# Altium PCB PowerScr.PcbDoc
Units mil, origin at the board's own origin, x right, y up, seen from the top; angles counter-clockwise.
Board outline 1889.76 x 2125 mil, 2 copper layers (Top Layer, Bottom Layer); 21 components, 12 nets, 65 pads, 14 vias.
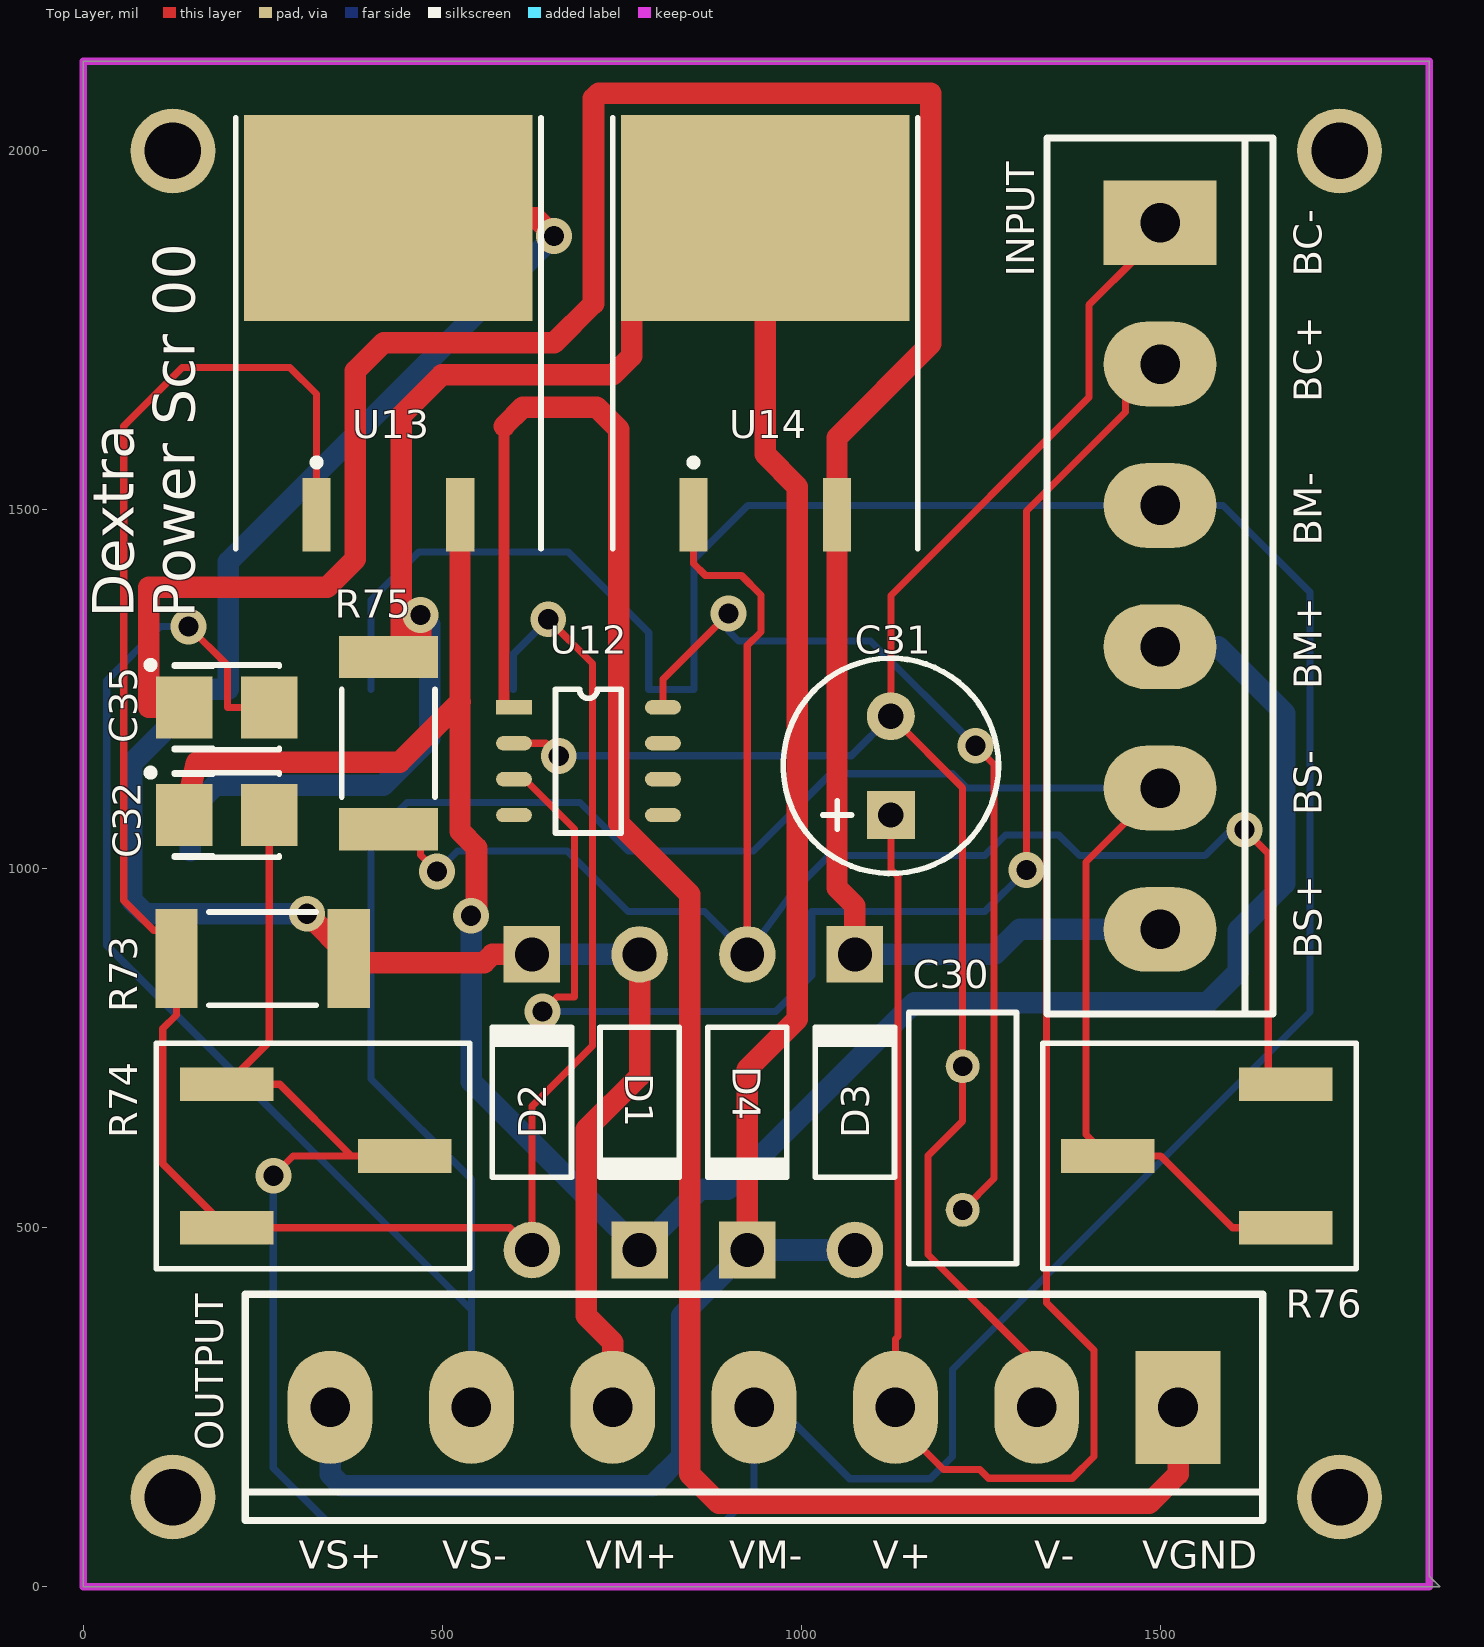
[diagram p0: Top Layer view]
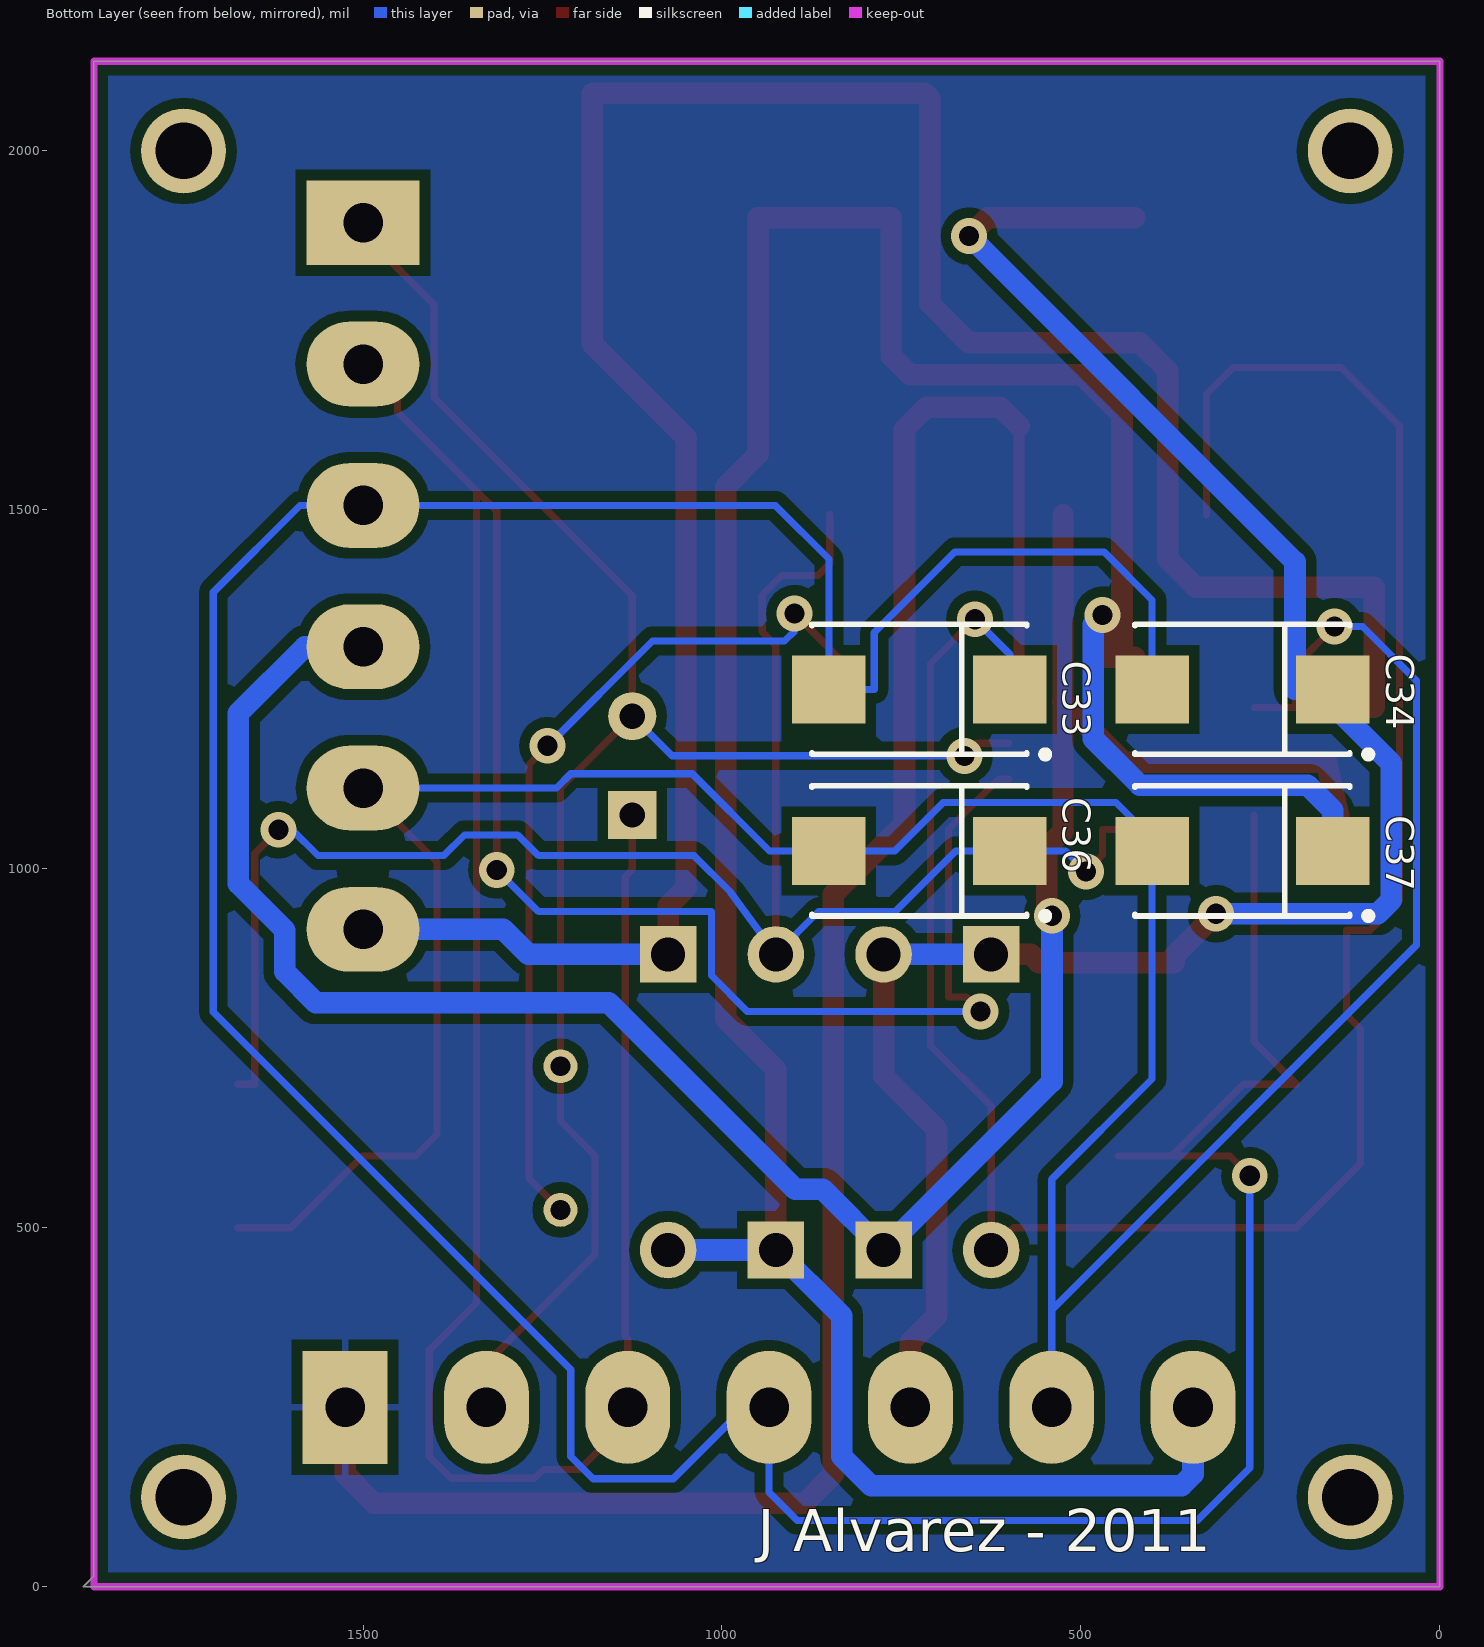
[diagram p1: Bottom Layer view, seen from below]

## Layer stack, top to bottom
Top Layer: signal copper 1.4
Dielectric: core 12.6, FR-4, Dk 4.8
Bottom Layer: signal copper 1.4

## Board outline
0,2125 1875,2125 1875,14.76 1889.76,0 0,0 0,2100 0,2125

## Design rules (kind name [scope] priority, off if disabled: settings)
Clearance [All] p1: gap=15
HoleToHoleClearance [All] p1: gap=15 allowstackedmicrovias=TRUE
MinimumSolderMaskSliver [All] p1: minsoldermaskwidth=8
PolygonConnect [All] p1: connectstyle=Relief reliefconductorwidth=10 reliefentries=4 polygonreliefangle="90 Angle"
RoomDefinition PowerScr [InComponentClass('PowerScr')] p1: confinementstyle=ConfineIn formatcopy=TRUE lockcomponents=FALSE outline 0,0 1875,0 1875,2125 0,2125
RoutingPriority [InNet('VGND')] p1: routingpriority=1
RoutingVias [All] p1: holewidth=28 width=50 viastyle="Through Hole" minholewidth=28 minwidth=50 maxholewidth=28 maxwidth=50
SMDNeckDown [All] p1: percent=75.000
SMDToCorner [All] p1 off: distance=0
SilkToSilkClearance [All] p1: silktosilkclearance=0
SilkscreenOverComponentPads [All] p1: minsilkscreentomaskgap=5
SolderMaskExpansion [All] p1: expansion=4
ViasUnderSMD [All] p1: allowed=FALSE
Width "Width GND" [InNet('VGND')] p1: maxlimit=40 minlimit=8 preferedwidth=30
Width "Width BATM" [InNet('BATMOT+')] p2: maxlimit=30 minlimit=8 preferedwidth=30
Width "Width BATS" [InNet('BATSTP+')] p3: maxlimit=40 minlimit=8 preferedwidth=30
Width "Width STP+" [InNet('VSTP+')] p4: maxlimit=40 minlimit=8 preferedwidth=30
Width "Width VM+" [InNet('VM+')] p5: maxlimit=30 minlimit=8 preferedwidth=30
Width [All] p6: maxlimit=10 minlimit=10 preferedwidth=10
23 further rules are at their usual default settings.

## Components (designator, comment, footprint, x,y, rotation, side; value= is the part's Value field where it differs from the comment)
C30 "Cap" RAD-0.2 1225,625 r270 top
C31 "Cap Pol1" C100UFB 1125,1075 r90 top
C32 "593D105X0020B2" 3528 200,1075 r0 top
C33 "593D226X0020D2" 7343 725,1250 r0 bottom
C34 "593D226X0020D2" 7343 275,1250 r0 bottom
C35 "593D105X0020B2" 3528 200,1225 r0 top
C36 "593D226X0020D2" 7343 725,1025 r0 bottom
C37 "593D226X0020D2" 7343 275,1025 r0 bottom
D1 "1N4002" DO-41 775,675 r270 top
D2 "1N4002" DO-41 625,675 r90 top
D3 "1N4002" DO-41 1075,675 r90 top
D4 "1N4002" DO-41 925,675 r270 top
INPUT "INPUT" AZUL5-6 1500,1900 r270 top (schematic designator P5)
OUTPUT "OUTPUT" AZUL5-7 1525,250 r180 top (schematic designator P6)
R73 "Res3" RESC6332M 250,875 r0 top
R74 "POT3361" 3361P 200,600 r270 top
R75 "Res3" RESC6332M 425,1175 r90 top
R76 "POT3361" 3361P 1675,600 r90 top
U12 "TLE2426" "SOP8 - duplicate" 600,1225 r0 top
U13 "LM317BD2T" 936-03 425,1700 r0 top
U14 "LM317BD2T" 936-03 950,1700 r0 top

## Footprints (in the part's own frame and the unit in brackets; to place one, negate y for a bottom-side part, rotate by r counter-clockwise, add the part's x,y. Pads: shape width x height; smd on the part's side, far side on the other; paste and mask are expansions set on the pad)
936-03 [mm] "D2-PAK/TO-263-AB; 3 Leads (1 Cropped); Body 14.7 (inc. leads) x 10.2 mm (LxW max)"
  rect 1x2.6 smd: 1(-2.54,-5.25) 3(2.54,-5.25)
  rect 10.2x7.3 smd: 4(0,5.25)
  silkscreen extent -5.4,-6.45 5.4,8.8
3361P [mm]
  rect 1.19x3.3 smd: 1(-2.54,0) 2(0,6.3) 3(2.54,0)
  silkscreen extent -3.99,-2.5 3.99,8.6
3528 [mm] "Capacitor, SM Tantalum; Body 3.5 x 2.8 mm (LxW typ)"
  rect 2x2.2 smd: 1(-1.5,0) 2(1.5,0)
  silkscreen extent -2.82,-1.5 1.85,1.62
7343 [mm] "Capacitor, SM Tantalum; Body 7.3 x 4.3 mm (LxW typ)"
  rect 2.6x2.4 smd: 1(-3.2,0) 2(3.2,0)
  silkscreen extent -4.57,-2.3 3.8,2.42
AZUL5-6 [mm]
  rect 3x4 hole 1.4: 1(0,0)
  oval 3x4 hole 1.4: 2(5,0) 3(10,0) 4(15,0) 5(20,0) 6(25,0)
  silkscreen extent -3,-4 28,4
AZUL5-7 [mm]
  rect 3x4 hole 1.4: 1(0,0)
  oval 3x4 hole 1.4: 2(5,0) 3(10,0) 4(15,0) 5(20,0) 6(25,0) 7(30,0)
  silkscreen extent -3,-4 33,4
C100UFB [mm]
  rect 1.7x1.7 hole 0.9: 1(0,0)
  round 1.7 hole 0.9: 2(3.5,0)
  silkscreen extent -2.07,-3.81 5.55,3.81
DO-41 [mm] "Diode, Axial; Body 5.2 x 2.7 mm (LxDia. max), Lead Dia. 0.86 mm (max)"
  round 2 hole 1.2: 1(-5.23,0)
  rect 2x2 hole 1.2: 2(5.23,0)
  silkscreen extent -2.65,-1.4 2.75,1.4
RAD-0.2 [mm] "Radial Cap, Thru-Hole; 2 Leads; 0.2 in Pin Spacing"
  round 1.2 hole 0.7: 1(-2.54,0) 2(2.54,0)
  silkscreen extent -4.45,-1.91 4.44,1.9
RESC6332M [mm] "Chip Resistor, Body 6.3x3.2mm, IPC Low Density"
  rect 1.5x3.5 smd: 1(-3.05,0) 2(3.05,0)
  silkscreen extent -1.9,-1.65 1.9,1.65, body extent -3.22,-1.68 3.22,1.68, height 0.71
"SOP8 - duplicate" [mm]
  rect 1.27x0.51 smd: 1(0,0)
  oval 1.27x0.51 smd: 2(0,-1.27) 3(0,-2.54) 4(0,-3.81) 5(5.27,-3.81) 6(5.27,-2.54) 7(5.27,-1.27) 8(5.27,0)
  silkscreen extent 1.47,-4.44 3.8,0.64

## Part data
C30: "Capacitor"
C31: "Polarized Capacitor (Radial)"
C32 C35: library part 593D106X0020B2, "Tantamount Commercial, Surface Mount Solid Tantalum Chip Capacitor for Switch Mode Power Supplies and Converters: 10uF, 20% Tolerance, 20 WVDC @ +85°C, Surge = 26V"
C33 C34 C36 C37: "Tantamount Commercial, Surface Mount Solid Tantalum Chip Capacitor for Switch Mode Power Supplies and Converters: 22uF, 20% Tolerance, 20 WVDC @ +85°C, Surge = 26V"
D1 D2 D3 D4: library part "Diode 1N4002", "1 Amp General Purpose Rectifier"
INPUT: library part "Header 6", "Header, 6-Pin"
OUTPUT: library part "Header 7", "Header, 7-Pin"
R73 R75: "Resistor"
U12: "Precision Virtual Ground"
U13 U14: "Three-Terminal Adjustable Output Positive Voltage Regulator"

## Free pads (board coordinates)
  round 118.11 hole 78.74: 0(125,2000) 2(1750,125) 3(125,125) 3(1750,2000)

## Via types
v1: diameter 50, hole 28, Top Layer to Bottom Layer, 14 vias

## Nets (pads, with @x,y where several pads share a name; then routed paths per layer and width w, separated by ;. In a path a pad name is that pad's centre, name@x,y a point inside that pad or via, vN(x,y) a via of type N, cw(c..) or ccw(c..) an arc to the next point about the centre after c; other vN are vias at no path point)
BATCIR+: C31.1 INPUT.2 OUTPUT.3 U12.3 | length 4561.9
  Top Layer w10: U12.3 614.8,1125 684.37,1055.42 684.37,821.53 659.83,821.53 v1(639.8,801.5) ; C31.1 1125,999.29 1134.8,989.5 1134.8,348.5 1131.3,345 OUTPUT.3 1131.3,230.5 1198.3,163.5 1248.8,163.5 1261.03,151.26 1377.56,151.26 1407.8,181.5 1407.8,329.5 1341.8,395.5 1341.8,1526.5 ; v1(1313.8,998.5) 1313.8,1498.5 1341.8,1526.5 ; INPUT.2 1451.8,1703.15 1451.8,1636.5 1341.8,1526.5
  Bottom Layer w10: v1(639.8,801.5) 964.8,801.5 1014.8,851.5 1014.8,940.5 1255.8,940.5 v1(1313.8,998.5)
BATCIR-: C30.1 C31.2 INPUT.1 OUTPUT.2 U12.2 | length 2502.8
  Top Layer w10: U12.2 644.8,1175 v1(662.3,1157.5) ; OUTPUT.2 1328.15,311.5 1176.8,462.85 1176.8,600.5 1225,648.7 C30.1 1225,1112.8 C31.2 1125,1380.7 1400.8,1656.5 1400.8,1785.5 1468.8,1853.5 1468.8,1900 INPUT.1
  Bottom Layer w10: v1(662.3,1157.5) 1069.7,1157.5 C31.2
BATMOT+: C32.1 D1.2 INPUT.4 U13.3 | length 3204.9
  Top Layer w29.53: 525,1052.16 525,1232.98 U13.3
  Top Layer w30: C32.1 157.95,1148.5 440.52,1148.5 525,1232.98 ; 525,1052.16 547.8,1029.37 547.8,942.25 v1(540.3,934.75)
  Bottom Layer w30: v1(540.3,934.75) 540.3,703.79 D1.2 859.4,553.5 897.8,553.5 1157.8,813.5 1565.8,813.5 1608.8,856.5 1608.8,914.62 1673.74,979.56 1673.74,1216.55 1580.84,1309.45 INPUT.4
BATMOT-: C32.2 C33.2 C34.2 INPUT.3 OUTPUT.4 R74.1 R74.2 | length 5630.9
  Top Layer w10: C32.2 259.06,759.06 R74.1 273.8,700 373.8,600 ; v1(264.8,572.5) 292.3,600 373.8,600 ; R74.2 373.8,600
  Bottom Layer w10: v1(264.8,572.5) 264.8,165.5 337.8,92.5 895.45,92.5 934.45,131.5 OUTPUT.4@934.45,228.5 ; C34.2 400.99,1374.69 467.89,1441.59 675.3,1441.59 787.8,1329.09 787.8,1250 C33.2 850.99,1431.5 925.79,1506.3 INPUT.3 1587.8,1506.3 1708.74,1385.35 1708.74,800.44 1210.8,302.5 1210.8,181.5 1179.8,150.5 1067.8,150.5 989.8,228.5 OUTPUT.4@934.45,228.5 ; OUTPUT.4 OUTPUT.4@934.45,228.5
BATSTP+: C35.1 D3.2 INPUT.6 U14.3 | length 3615.9
  Top Layer w29.53: 1050,973.5 U14.3 1050,1600.5
  Top Layer w30: C35.1 91.3,1225 91.3,1392 91.8,1392.5 339.8,1392.5 378.8,1431.5 378.8,1693.5 418.29,1732.99 656.29,1732.99 710.8,1787.5 710.8,2073.5 717.8,2080.5 1180.8,2080.5 1180.8,1731.29 1050,1600.5 ; 1050,973.5 1075,948.5 D3.2
  Bottom Layer w30: D3.2 1269.8,880.91 1304.64,915.75 INPUT.6
BATSTP-: C35.2 C36.2 C37.2 INPUT.5 OUTPUT.6 R76.1 R76.2 | length 4333.6
  Top Layer w10: v1(146.8,1337.5) 200.8,1283.5 200.8,1225 C35.2 ; INPUT.5 1396.8,1009.39 1396.8,630.17 R76.2 1500.8,600 1600.8,500 R76.1
  Bottom Layer w10: v1(146.8,1337.5) 107.8,1337.5 32.8,1262.5 32.8,893.5 540.75,385.54 ; OUTPUT.6 540.75,385.54 ; INPUT.5 1230.64,1112.6 1210.74,1132.5 1041.29,1132.5 933.8,1025 C36.2 759.29,1025 691.8,1092.5 451.09,1092.5 400.99,1042.4 C37.2 400.99,707.26 540.75,567.5 540.75,385.54
NetC30_2: C30.2 U12.8 | length 1278.2
  Top Layer w10: U12.8 807.8,1225 807.8,1264.5 v1(898.8,1355.5) ; C30.2 1268.8,568.8 1268.8,1145.5 v1(1242.8,1171.5)
  Bottom Layer w10: v1(898.8,1355.5) 898.8,1331.5 912.8,1317.5 1096.8,1317.5 v1(1242.8,1171.5)
NetC33_1: C33.1 D2.1 R73.1 R74.3 U13.1 | length 3191.8
  Top Layer w10: U13.1 325,1661.29 287.8,1698.5 137.8,1698.5 56.3,1617 56.3,955.99 97.8,914.5 129.92,914.5 R73.1 129.92,796.62 110.8,777.5 110.8,589.2 R74.3 594.09,500 D2.1 625,669.33 709.37,753.7 709.37,1286.14 v1(647.8,1347.72)
  Bottom Layer w10: C33.1 599.02,1298.94 v1(647.8,1347.72)
NetC36_1: C36.1 D4.1 R75.1 R76.3 U14.1 | length 2494.1
  Top Layer w10: R75.1 469.8,1054.92 469.8,1019.5 v1(492.8,996.5) ; U14.1 850,1425.29 866.43,1408.86 916.57,1408.86 943.94,1381.5 943.94,1330 925,1311.07 D4.1 ; v1(1617.8,1054.5) 1650.8,1021.5 1650.8,700 R76.3
  Bottom Layer w10: v1(492.8,996.5) 521.3,1025 C36.1 674.29,1025 758.8,940.5 865.41,940.5 D4.1 988.31,967.59 1039.22,1018.5 1255.8,1018.5 1284.64,1047.34 1358.8,1047.34 1387.64,1018.5 1562.8,1018.5 1598.8,1054.5 v1(1617.8,1054.5)
VGND: OUTPUT.1 U12.1 | length 2892.8
  Top Layer w15.06: 586.17,1616.87 586.17,1225 U12.1
  Top Layer w30: 586.17,1616.87 612.29,1642.99 715.3,1642.99 745.8,1612.5 745.8,1063.5 844.8,964.5 844.8,156.5 885.03,116.26 1484.76,116.26 1525,156.5 OUTPUT.1
VM+: C34.1 D1.1 D2.2 OUTPUT.5 R73.2 U13.4 | length 2871.3
  Top Layer w30: v1(311.8,937.5) 370.08,879.21 R73.2 370.08,869.5 558.6,869.5 570.01,880.91 D2.2 ; U13.4 630.6,1906.69 v1(655.8,1881.5) ; OUTPUT.5 737.6,340.69 700.8,377.5 700.8,637.29 775,711.5 D1.1
  Bottom Layer w30: v1(311.8,937.5) 86.8,937.5 67.8,956.5 67.8,1147.28 149.02,1228.5 C34.1 201.8,1250 201.8,1427.5 v1(655.8,1881.5) ; D2.2 D1.1
VSTP+: C37.1 D3.1 D4.2 OUTPUT.7 R75.2 U14.4 | length 4349.9
  Top Layer w30: R75.2 R75.2@442.8,1295.08 ; v1(469.8,1353.5) 469.8,1295.08 R75.2@442.8,1295.08 ; D4.2 925,720.7 994.8,790.5 994.8,1532.5 949.8,1577.5 U14.4@949.8,1906.69 ; U14.4 U14.4@949.8,1906.69 ; R75.2@442.8,1295.08 442.8,1631.5 499.29,1687.99 737.8,1687.99 764.21,1714.41 764.21,1906.69 U14.4@949.8,1906.69
  Bottom Layer w30: C37.1 149.02,1081.5 184.02,1116.5 417.8,1116.5 482.8,1181.5 482.8,1340.5 v1(469.8,1353.5) ; OUTPUT.7 343.9,156.5 359.9,140.5 792.4,140.5 833.4,181.5 833.4,377.5 D4.2 D3.1
pads on no net: U12.4 U12.5 U12.6 U12.7

## Polygon pours and split planes (outlines as drawn)
VGND on Bottom Layer "Bottom Overlay-No Net" (solid, pour order 4): 0,2125 1875,2125 1875,0 0,0 0,2125

## Keep-outs
Keep-Out Layer:
  lines w10: 0,0 0,2125 1875,2125 1875,1570.28 1875,0 0,0

## Silkscreen, mask and mechanical layers (free items; w line width, h text height)
Top Overlay:
  text "BC-" at 1725,1825 h39.37 r90
  text "BC+" at 1725,1650 h39.37 r90
  text "BM-" at 1725,1450 h39.37 r90
  text "Dextra" at 90,1350 h99.37 r90
  text "Power Scr 00" at 175,1350 h99.37 r90
  text "BM+" at 1725,1250 h39.37 r90
  text "BS-" at 1725,1075 h39.37 r90
  text "BS+" at 1725,875 h39.37 r90
  text "VS+" at 300,25 h39.37
  text "VS-" at 500,25 h39.37
  text "VM+" at 700,25 h39.37
  text "VM-" at 900,25 h39.37
  text "V+" at 1100,25 h39.37
  text "V-" at 1325,25 h39.37
  text "VGND" at 1475,25 h39.37
Bottom Overlay:
  text "J Alvarez - 2011" at 950,30 h100